# EAGLE board UCCS_Senior_Design_2 (EAGLE 7.7.0)
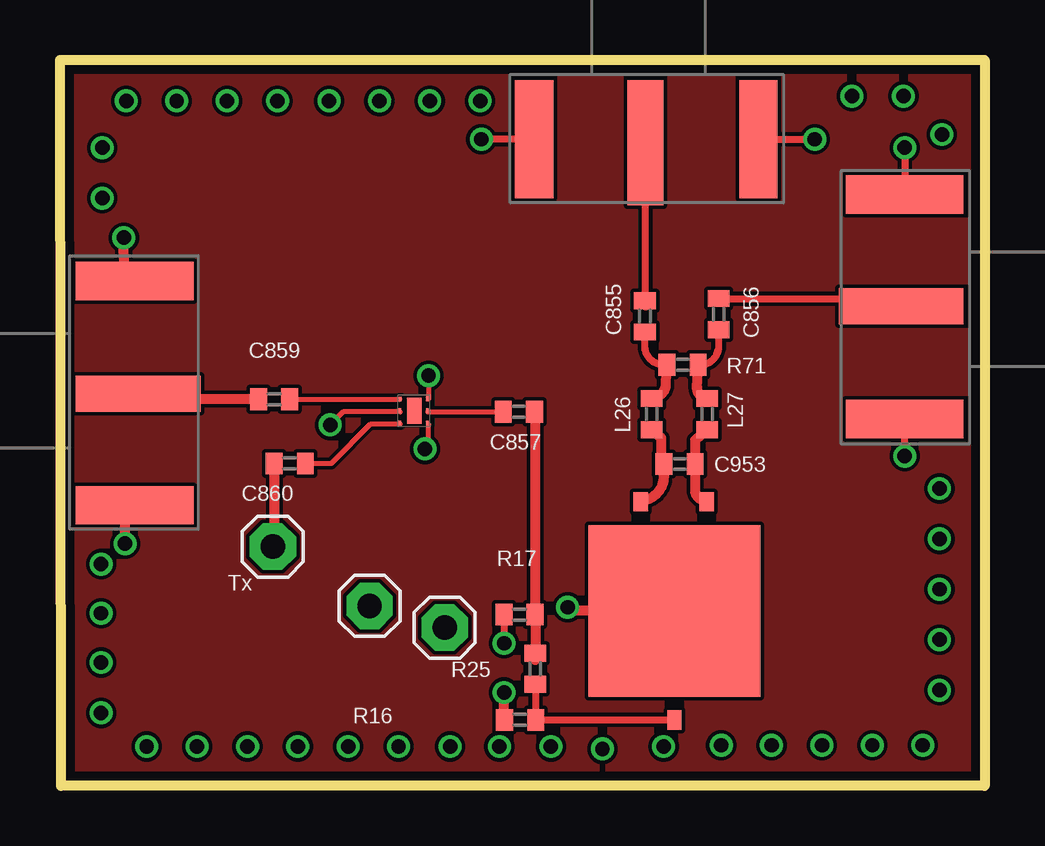
[diagram p0: board, top side]
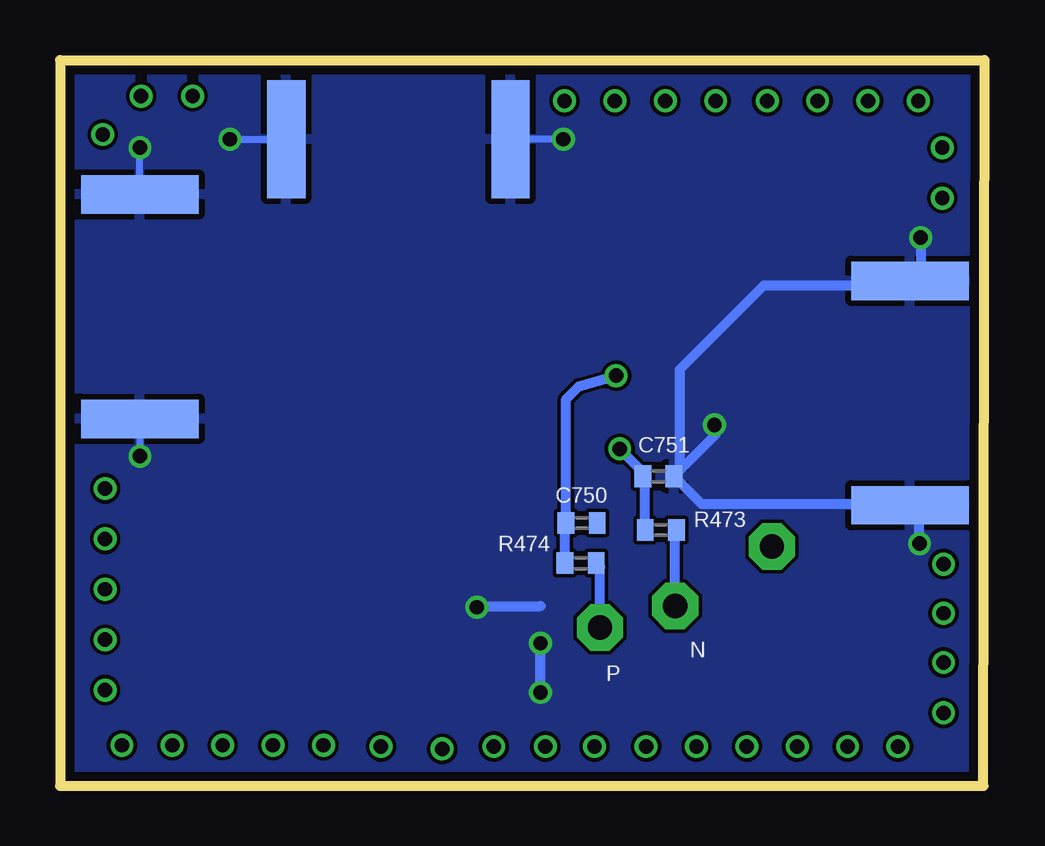
[diagram p1: board, bottom side, seen from below]

Size 38.55 x 30.25 mm. Coordinates in mm from the lower left corner, seen from the top.
Outline: 38.55,30.24 38.55,0 0.05,0 0,30.24 38.55,30.24
Copper layers (1*16): Top 0.0356mm / dielectric 1.5011mm / Bottom 0.0356mm
Design rules "oshpark-2layer": minimum track width 6mil, minimum drill 13mil, track to track 6mil, track to pad 6mil, pad to pad 6mil, via to via 6mil, smd to smd 6mil, copper to edge 15mil, drill to drill 6mil, minimum pad ring 7mil, minimum via ring 7mil, stop-mask expansion 2.5mil, vias tented up to drill 0mil, thermal gap 10mil

## Footprints (pad centres in the part's own frame; a part is rotated, then mirrored left to right if it is on the bottom)
C0402 = smd 0.7 x 0.9: 1 -0.65,0; 2 0.65,0
SKY13431-374LF = smd 0.1 x 0.2: P$1 0.07,1.13; P$2 0.055,0.635; P$3 0.055,0.13; P$4 1.205,0.13; P$5 1.2,0.64; P$6 1.205,1.135 | smd 0.6 x 1.1: P$7 0.65,0.64
SMA132289 = smd 1.6 x 4.9 bottom: GND 0.9,2.55; P$5 10.25,2.55 | smd 1.6 x 4.9: P$1 10.25,2.55; P$2 0.9,2.55 | smd 1.5 x 5.2: P$3 5.6,2.7
BALH-0006SMG = smd 0.6 x 0.8: 1 4.25,8.95; 2 2.9,-0.15; 3 5.65,-0.15 | smd 7.15 x 7.15: GND 4.25,4.4
R0402 = smd 0.7 x 0.9: 1 -0.65,0; 2 0.65,0
1X01 = drill 1.016 pad 1.93 octagon: 1 0,0

## Placement (x,y rotation side)
C750  100 pF  [C0402]  16.8,10.96 0 bottom
C751  100 pF  [C0402]  13.6,12.9 0 bottom
C855  100 pF  [C0402]  24.39,19.57 90 top
C856  100 pF  [C0402]  27.46,19.66 90 top
C857  100 pF  [C0402]  19.13,15.59 180 top
C859  100 pF  [C0402]  8.93,16.11 180 top
C860  100 pF  [C0402]  9.58,13.44 180 top
C953  400 fF  [C0402]  25.83,13.41 180 top
E$2  [SKY13431-374LF]  14.12,14.99 0 top
E$3  [SMA132289]  0.57,21.94 270 top
E$4  [SMA132289]  37.77,14.39 90 top
E$5  [SMA132289]  30.02,29.49 180 top
E$6  [BALH-0006SMG]  29.87,11.69 180 top
L26  1 nH  [R0402]  24.66,15.49 90 top
L27  1 nH  [R0402]  26.97,15.49 90 top
R16  221 Ohm  [R0402]  19.18,2.75 180 top
R17  221 Ohm  [R0402]  19.16,7.13 180 top
R25  23.7 Ohm  [R0402]  19.82,4.88 270 top
R71  93.7 Ohm  [R0402]  25.96,17.55 0 top
R473  100 Ohm  [R0402]  13.51,10.67 180 bottom
R474  100 Ohm  [R0402]  16.84,9.28 180 bottom
RX1_N1  [1X01]  12.91,7.5 0 top
RX1_N2  [1X01]  16.04,6.6 0 top
RX1_P1  [1X01]  8.87,9.97 0 top

## Library data of the parts
C750 C751 C855-C857 C859 C860 C953 L26 L27 R16 R17 R25 R71 R473 R474 = eagle-ltspice
E$2-E$6 = cody_custom_library
RX1_N1 RX1_N2 RX1_P1 = adafruit

## Nets
GND: C751.2 E$3.GND E$3.P$5 E$4.GND E$4.P$1 E$4.P$2 E$4.P$5 E$5.GND E$5.P$1 E$5.P$2 E$5.P$5 E$6.GND R16.2 R17.2
S$1: C751.1 R473.2
S$2: C750.1 R474.2
S$5: C855.2 E$5.P$3
S$6: R473.1 RX1_N1.1
S$10: R16.1 R25.2
S$12: C857.2
S$24: C953.2 L26.1
S$25: C859.1
S$27: C860.1
S$28: C750.2
S$32: C860.2 RX1_P1.1
S$37: R474.1 RX1_N2.1
S$38: C856.2 E$4.P$3
S$40: C953.1 L27.1
S$43: C855.1 L26.2 R71.1
S$44: C856.1 L27.2 R71.2
S$79: C859.2 E$3.P$3
S$85: C857.1 R17.1 R25.1

## Tracks (layer width: path | path; a pad name or v marks a point on that pad's centre or on a via)
GND  (via drill 0.6)
  Top 0.2: 14.19,15.58 11.81,15.58 v11.27,15.04
  Top 0.254: 2.54,11.98 2.67,12.11 | 2.7,20.62 2.67,20.6
  Top 0.3: R17.2 v18.52,5.94 | 21.17,7.39 v21.17,7.44 | v35.22,13.74 E$4.P$2 | v35.22,26.59 E$4.P$1 | E$5.P$2 v31.47,26.94 | E$5.P$1 v17.57,26.94
  Top 0.406: 2.67,12.11 2.67,11.19 v2.72,10.09 | 2.67,20.6 2.67,21.49 v2.67,22.84 | R16.2 18.52,2.75 v18.52,3.89 | E$6.GND 21.17,7.29 v21.17,7.44
  Bottom 0.3: E$4.P$2 v35.22,13.74 | E$4.P$1 v35.22,26.59 | v31.47,26.94 E$5.P$2 | v17.57,26.94 E$5.P$1
  Bottom 0.406: v2.72,10.09 2.72,11.69 2.77,11.74 11.79,11.74 C751.2 11.22,14.64 11.22,15.04 v11.27,15.04 | 2.67,21.59 v2.67,22.84 2.67,20.89 2.72,20.84 9.22,20.84 12.72,17.34 12.72,13.19 12.97,12.94 | v18.52,3.89 v18.52,5.94 | v21.17,7.44 21.32,7.44 21.32,7.49 18.52,7.49
  pour Bottom: 0.02,30.19 38.62,30.19 38.52,-0.01 0.02,-0.01
S$1  (via drill 0.6)
  Top 0.2: v15.22,14.04 15.37,14.19 15.37,15.05
  Bottom 0.406: R473.2 14.16,12.8 C751.1 14.25,13.08 v15.22,14.04
S$2  (via drill 0.6)
  Top 0.2: v15.37,17.09 15.37,16.12
  Bottom 0.406: R474.2 17.49,10.92 C750.1 17.45,16.11 16.92,16.64 v15.37,17.09
S$5
  Top 0.3: 24.42,20.02 E$5.P$3
  Top 0.406: C855.2 24.42,20.02
S$6
  Bottom 0.406: RX1_N1.1 12.91,10.61 R473.1
S$8  (via drill 0.6)
  other vias: 25.17,1.64
S$10
  Top 0.3: R25.2 19.82,2.77 | R16.1 25.53,2.75
  Top 0.406: 19.82,2.77 R16.1 | 25.53,2.75 25.57,2.79
S$12
  Top 0.2: 15.34,15.59 C857.2
  Top 0.406: 18.34,15.59 C857.2
S$24
  Top 0.406: C953.2 25.07,13.56 25.07,14.49 L26.1 24.59,14.82 | 25.3,13.45 C953.2 | 25.12,13.5 C953.2 | 24.17,11.89 arc90 25.18,12.9 C953.2
S$25
  Top 0.2: C859.1 14.17,16.11
S$27
  Top 0.2: C860.1 11.31,13.44 12.96,15.08 14.18,15.08
S$32
  Top 0.406: C860.2 8.93,10.03 RX1_P1.1
S$37
  Bottom 0.406: RX1_N2.1 16.04,9.13 R474.1
S$38
  Top 0.3: C856.2 35.07,20.3 E$4.P$3
  Top 0.406: 35.07,20.01 E$4.P$3
S$39  (via drill 0.6)
  other vias: 17.52,28.54
S$40
  Top 0.406: 26.9,14.82 L27.1 26.48,14.4 C953.1 26.48,12.33 arc90 26.92,11.89
S$43
  Top 0.3: R71.1 arc-90 24.39,18.22 C855.1
  Top 0.406: 25.26,17.47 R71.1 25.26,16.79 arc-90 L26.2
S$44
  Top 0.3: R71.2 arc90 27.46,18.25 C856.1
  Top 0.406: L27.2 arc-90 26.56,16.61 R71.2
S$45  (via drill 0.6)
  other vias: 15.42,28.54
S$46  (via drill 0.6)
  other vias: 13.32,28.54
S$47  (via drill 0.6)
  other vias: 11.22,28.54
S$48  (via drill 0.6)
  other vias: 9.07,28.54
S$49  (via drill 0.6)
  other vias: 6.97,28.54
S$50  (via drill 0.6)
  other vias: 4.87,28.54
S$51  (via drill 0.6)
  other vias: 2.77,28.54
S$52  (via drill 0.6)
  other vias: 1.77,26.59
S$53  (via drill 0.6)
  other vias: 1.77,24.49
S$54  (via drill 0.6)
  other vias: 1.72,9.24
S$55  (via drill 0.6)
  other vias: 1.72,7.19
S$56  (via drill 0.6)
  other vias: 1.72,5.14
S$57  (via drill 0.6)
  other vias: 1.72,3.04
S$58  (via drill 0.6)
  other vias: 3.62,1.64
S$59  (via drill 0.6)
  other vias: 5.72,1.64
S$60  (via drill 0.6)
  other vias: 7.82,1.64
S$61  (via drill 0.6)
  other vias: 9.92,1.64
S$62  (via drill 0.6)
  other vias: 12.02,1.64
S$63  (via drill 0.6)
  other vias: 14.12,1.64
S$64  (via drill 0.6)
  other vias: 16.27,1.64
S$65  (via drill 0.6)
  other vias: 27.57,1.69
S$66  (via drill 0.6)
  other vias: 29.67,1.69
S$67  (via drill 0.6)
  other vias: 31.77,1.69
S$68  (via drill 0.6)
  other vias: 33.87,1.69
S$69  (via drill 0.6)
  other vias: 35.97,1.69
S$70  (via drill 0.6)
  other vias: 36.67,3.99
S$71  (via drill 0.6)
  other vias: 36.67,6.09
S$72  (via drill 0.6)
  other vias: 36.67,8.19
S$73  (via drill 0.6)
  other vias: 36.67,10.29
S$74  (via drill 0.6)
  other vias: 36.67,12.39
S$75  (via drill 0.6)
  other vias: 36.77,27.14
S$76  (via drill 0.6)
  other vias: 35.17,28.74
S$77  (via drill 0.6)
  other vias: 33.02,28.74
S$78
  Top 0.406: 2.63,16.11 2.6,16.14
S$79
  Top 0.406: C859.2 3.27,16.11 E$3.P$3
S$82  (via drill 0.6)
  other vias: 22.62,1.54
S$83  (via drill 0.6)
  other vias: 20.47,1.64
S$84  (via drill 0.6)
  other vias: 18.32,1.64
S$85
  Top 0.406: C857.1 19.81,15.59 R17.1 19.82,7.13 R25.1 19.81,5.24
SIGGND
  pour Top: 0.07,30.19 0.07,-0.01 38.57,-0.01 38.57,30.24 0.07,30.24

## Text on the board
tPlace: Tx
bPlace: N | P